# Altium PCB M10S Breakout Schematic.PcbDoc
Units mm, origin at the board's own origin, x right, y up, seen from the top; angles counter-clockwise.
Board outline 60.02 x 29.99 mm, 4 copper layers (Top Layer, Mid Layer 1, Mid Layer 2, Bottom Layer), stack 1.57 mm thick; 33 components, 23 nets, 98 pads, 47 vias.
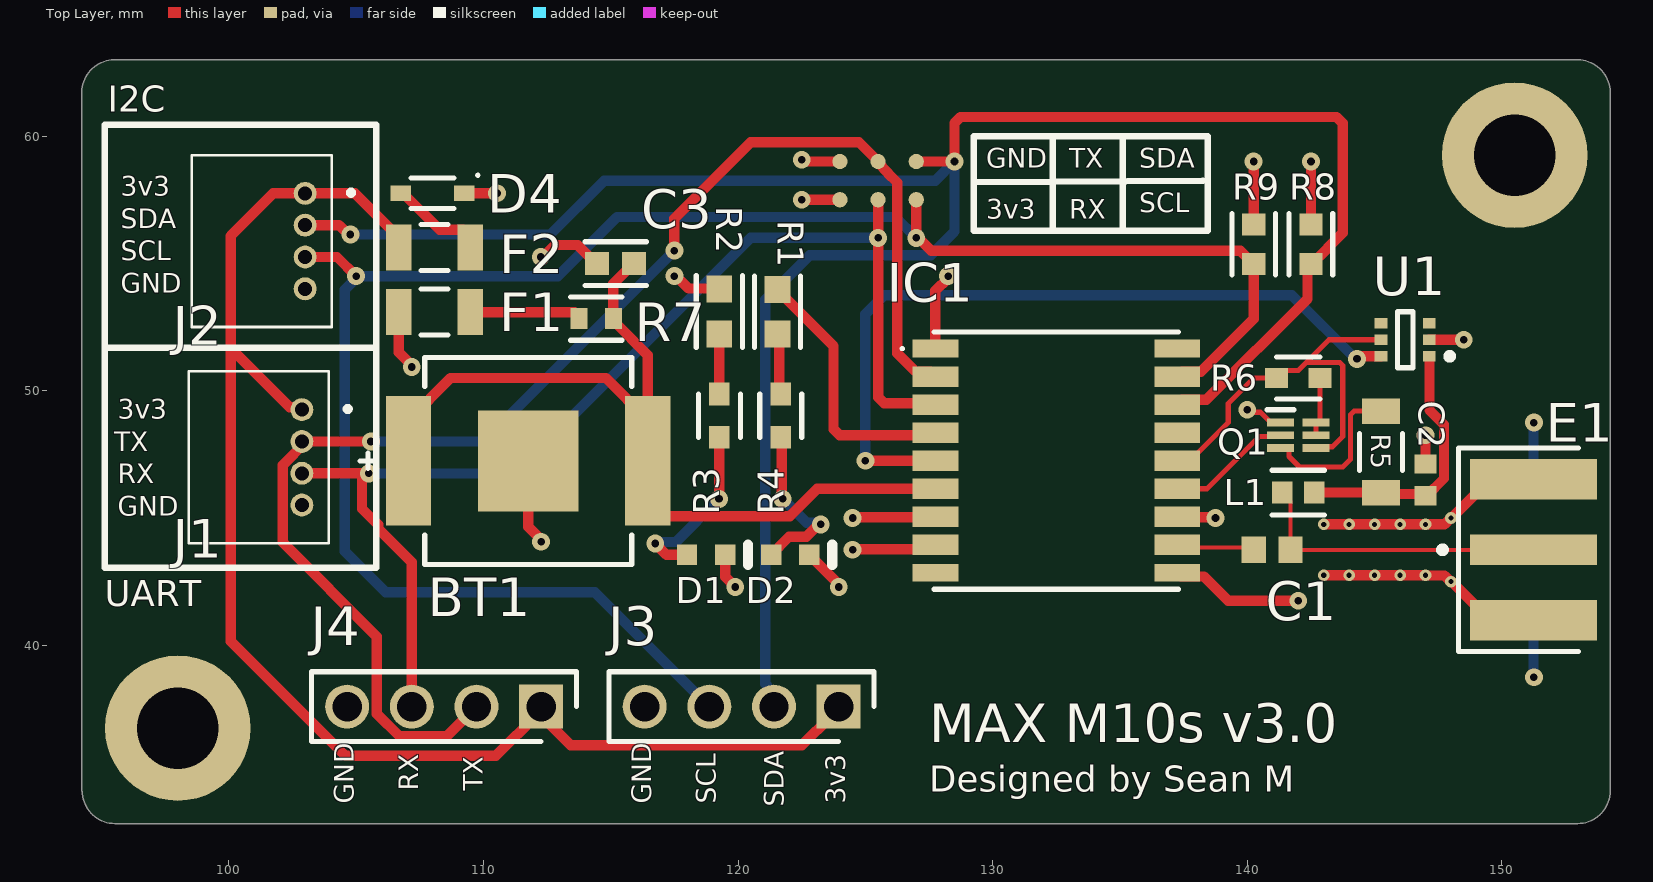
[diagram p0: Top Layer view]
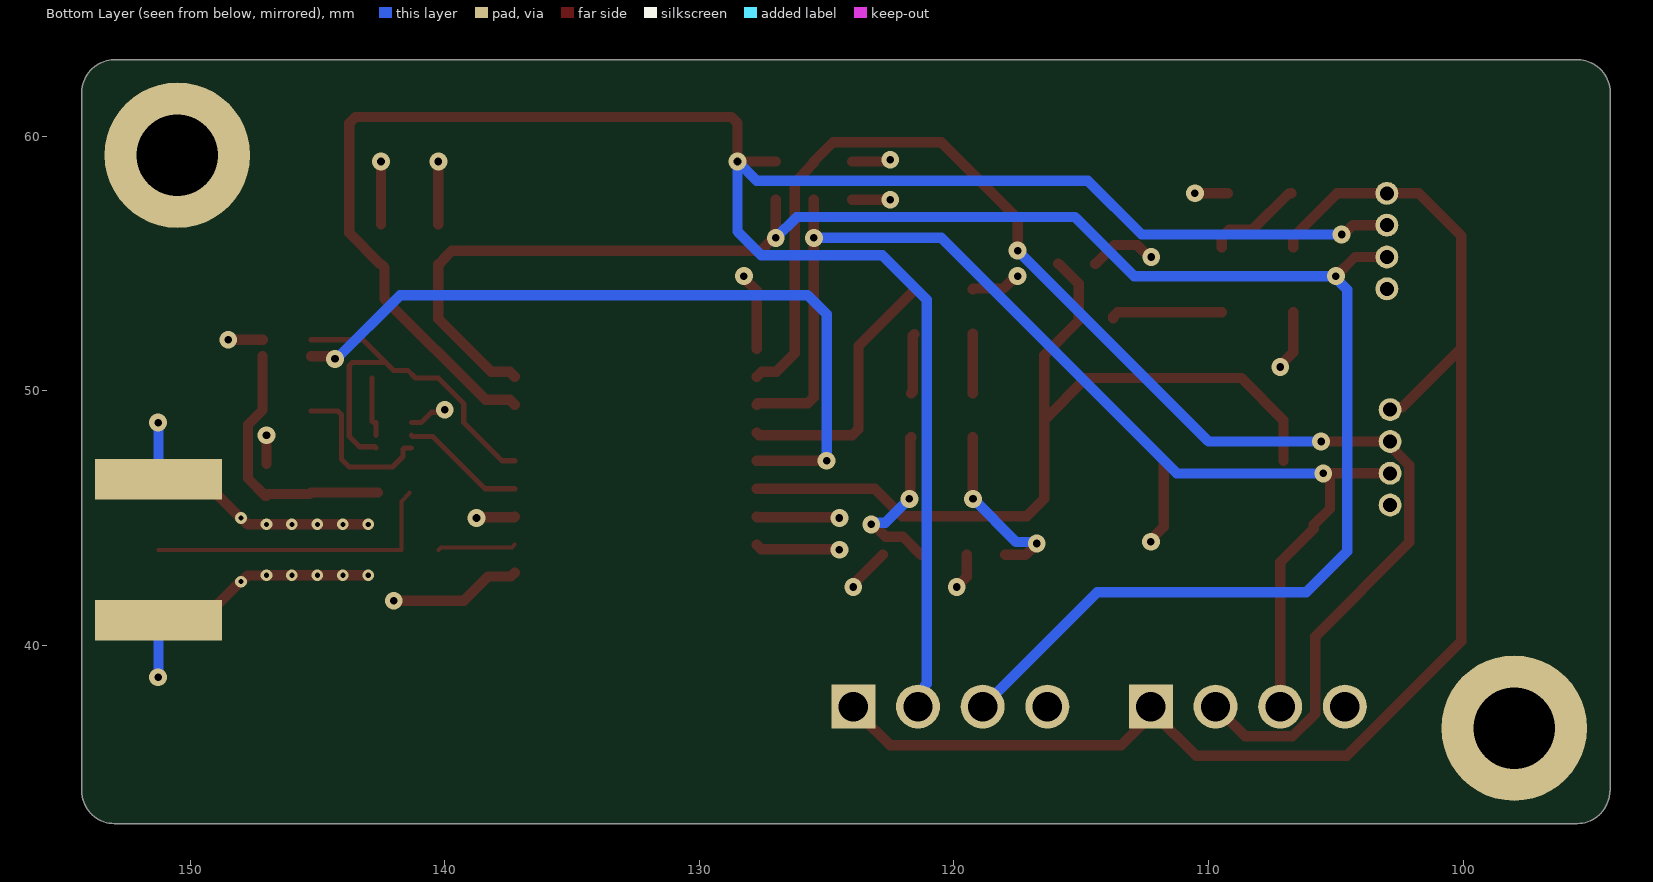
[diagram p1: Bottom Layer view, seen from below]
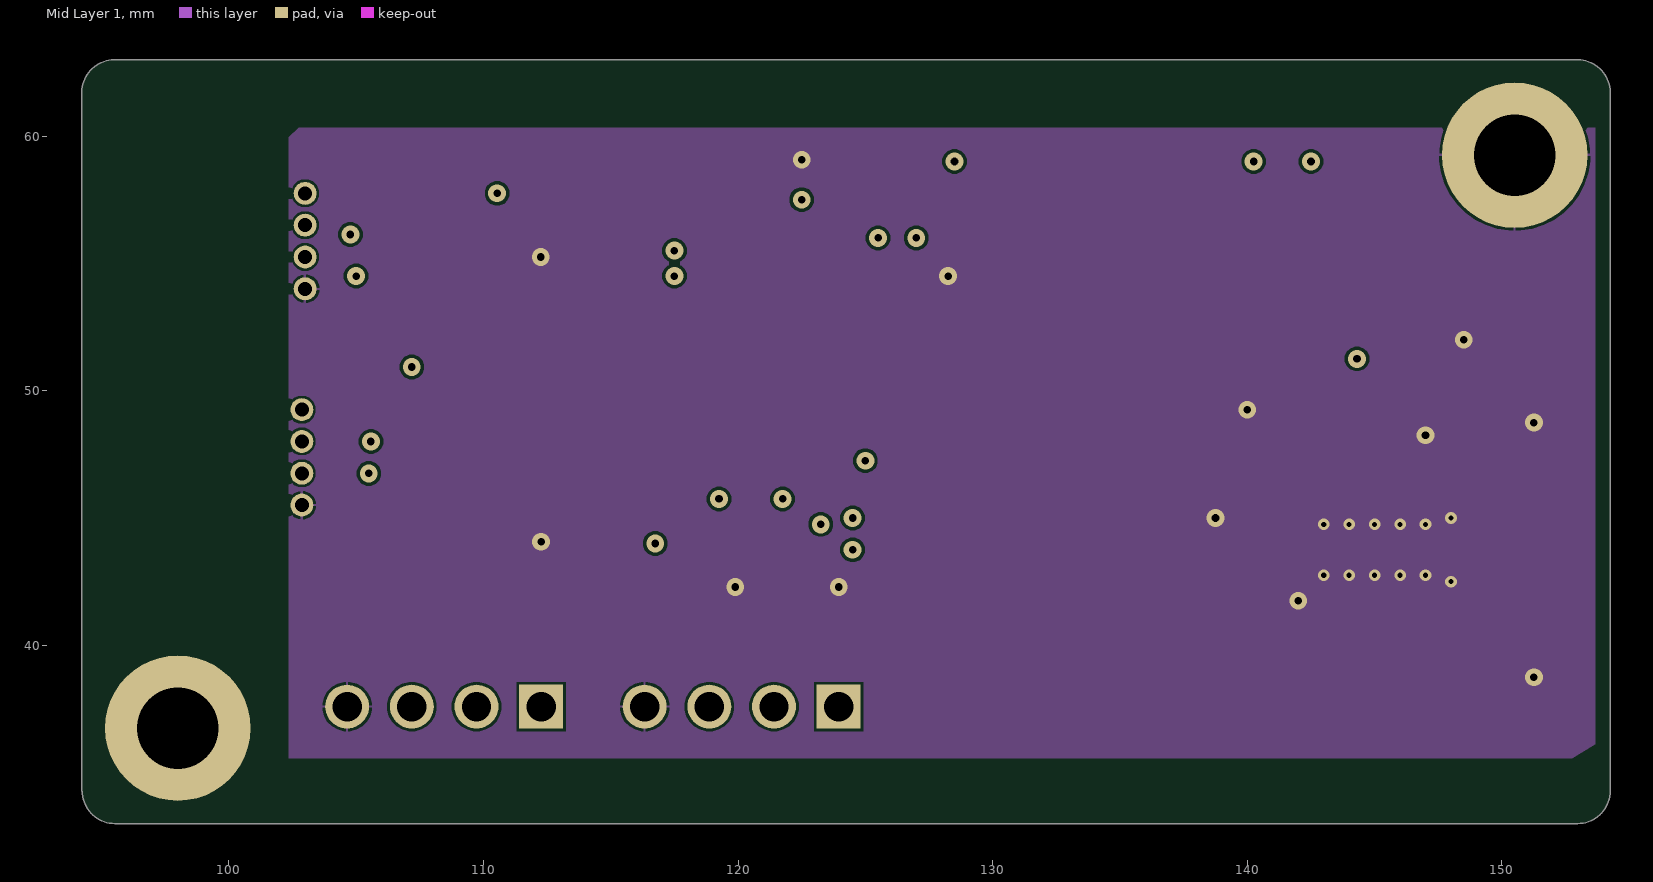
[diagram p2: Mid Layer 1]
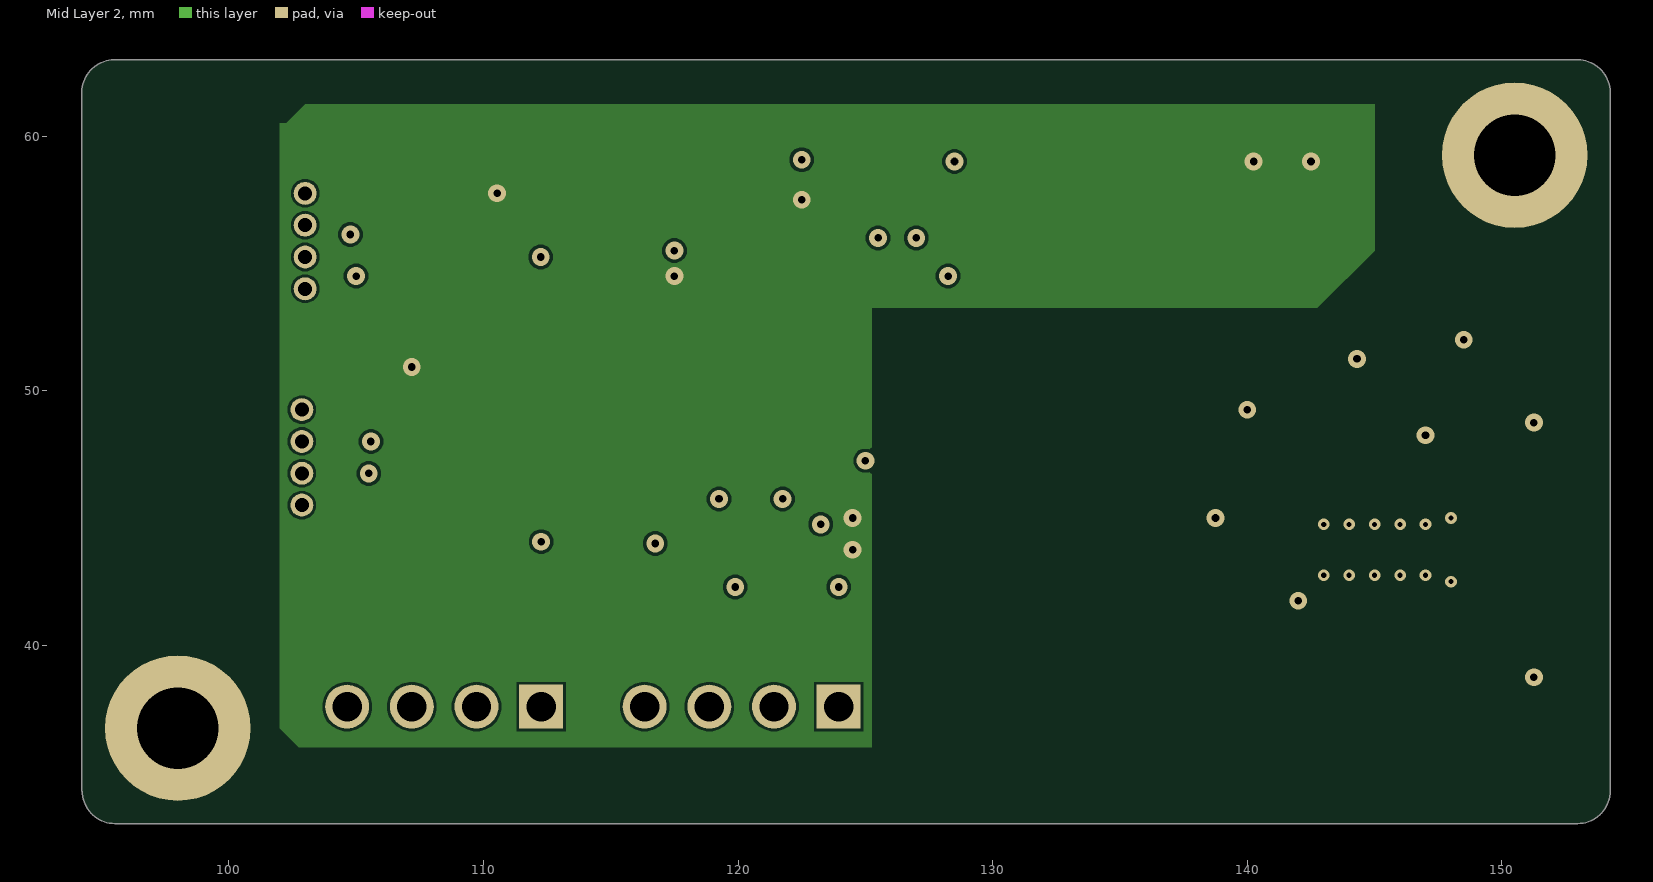
[diagram p3: Mid Layer 2]
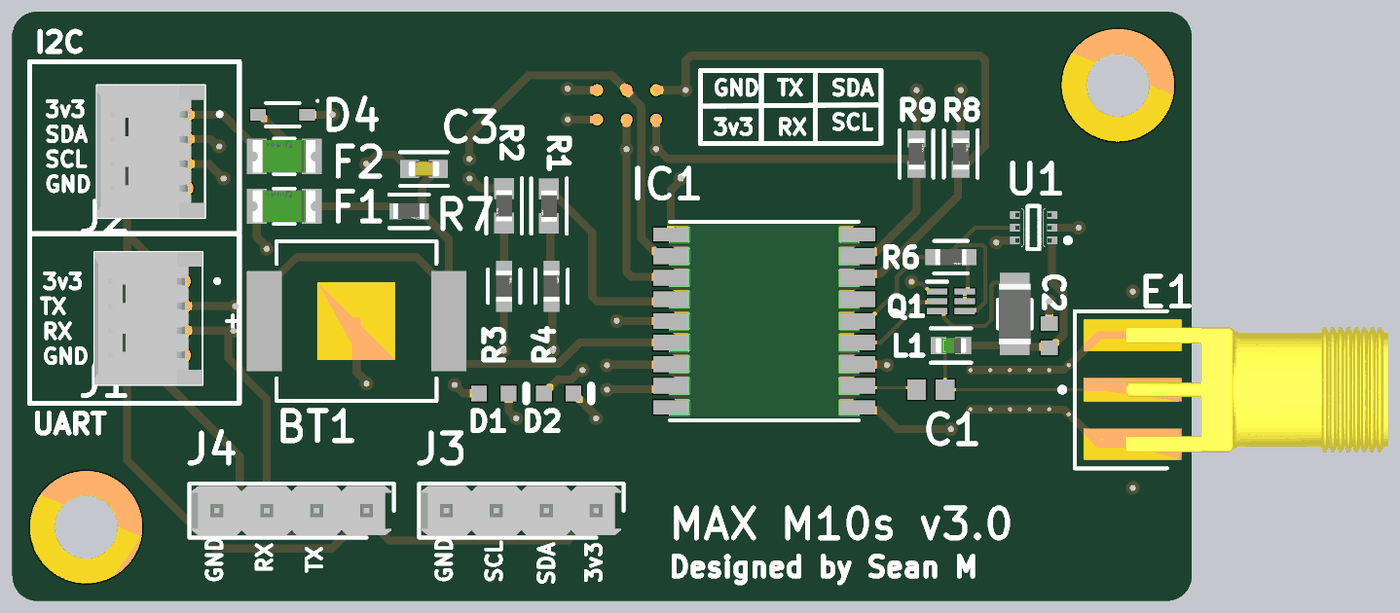
[diagram p4: 3D render of the assembled board from above, using the file's embedded part models]

## Layer stack, top to bottom
Top Solder: solder mask 0.0127, Solder Resist, Dk 3.8
Top Layer: signal copper 0.035
Dielectric 1: prepreg 0.1, 2313, Dk 4.05
Mid Layer 1: signal copper 0.0175
Core: core 1.265, FR-4, Dk 4.5
Mid Layer 2: signal copper 0.0175
Dielectric 2: prepreg 0.1, 2313, Dk 4.05
Bottom Layer: signal copper 0.035
Bottom Solder: solder mask 0.0127, Solder Resist, Dk 3.8

## Board outline
94.23,34.29 ccw(c94.25,34.29) 94.25,34.27 ccw(c95.52,34.27) 95.52,33 152.98,33 ccw(c152.98,34.27) 154.25,34.27 154.25,61.722 ccw(c152.98,61.722) 152.98,62.992 95.5,62.992 ccw(c95.5,61.722) 94.23,61.722

## Design rules (kind name [scope] priority, off if disabled: settings)
BoardOutlineClearance [All] p1: gap=0.2 ignorepadtopadclearanceinfootprint=FALSE
Clearance [All] p1: gap=0.102 ignorepadtopadclearanceinfootprint=FALSE except(0.127: Arc-Via Track-Via SMDPad-Via THPad-Via Via-Via Via-Fill Via-Poly Via-Region Via-Text; 0.25: Arc-Hole Track-Hole SMDPad-Hole THPad-Hole Via-Hole Fill-Hole Poly-Hole Region-Hole Text-Hole)
ComponentClearance [All] p1: gap=0.102 collisioncheckmode=3 verticalgap=0.102 showdistances=TRUE
DiffPairsRouting [All] p1: maxlimit=0.102 minlimit=0.102 mostfreqgap=0.102 toplayer_minwidth=0.102 toplayer_maxwidth=1816.048 toplayer_prefwidth=0.102 midlayer1_minwidth=0.102 midlayer1_maxwidth=1816.048 midlayer1_prefwidth=0.102 midlayer2_minwidth=0.102 midlayer2_maxwidth=1816.048 midlayer2_prefwidth=0.102 bottomlayer_minwidth=0.102 bottomlayer_maxwidth=1816.048 bottomlayer_prefwidth=0.102 maxuncoupledlength=12.7
Height [All] p1: minheight=0 maxheight=1816.048 prefheight=12.7
HoleSize [All] p1: absolutevalues=TRUE maxlimit=6.3 minlimit=0.2 maxpercent=80.000 minpercent=20.000
HoleToHoleClearance [All] p1: gap=0.25 allowstackedmicrovias=FALSE
MinimumAnnularRing [All] p1: minimumring=0.076
MinimumSolderMaskSliver [All] p1: minsoldermaskwidth=0
PlaneClearance [All] p1: clearance=0.102
PlaneConnect PlaneConnectPowerPads [InPadClass('PowerPads')] p1: planeconnectstyle=Direct reliefexpansion=0.508 reliefentries=4 reliefconductorwidth=0.254 reliefairgap=0.254
PlaneConnect [All] p2: pad.planeconnectstyle=Relief pad.reliefexpansion=0.3 pad.reliefentries=4 pad.reliefconductorwidth=0.102 pad.reliefairgap=0.102 via.planeconnectstyle=Direct via.reliefexpansion=0.3 via.reliefentries=4 via.reliefconductorwidth=0.127 via.reliefairgap=0.127
PolygonConnect PolygonConnectPowerPads [All vs (InPadClass('PowerPads'))] p1: connectstyle=Direct reliefconductorwidth=0.254 reliefentries=4 polygonreliefangle="90 Angle" airgapwidth=0.254
PolygonConnect [All] p2: thpad.connectstyle=Relief thpad.reliefconductorwidth=0.102 thpad.reliefentries=4 thpad.polygonreliefangle="90 Angle" thpad.airgapwidth=0.102 smdpad.connectstyle=Relief smdpad.reliefconductorwidth=0.102 smdpad.reliefentries=4 smdpad.polygonreliefangle="90 Angle" smdpad.airgapwidth=0.102 via.connectstyle=Direct via.reliefconductorwidth=0.127 via.reliefentries=4 via.polygonreliefangle="90 Angle" via.airgapwidth=0.127
RoutingVias [All] p1: holewidth=0.2 width=0.45 viastyle="Through Hole" minholewidth=0.2 minwidth=0.45 maxholewidth=6.3 maxwidth=6.55
SilkToSilkClearance [All] p1: silktosilkclearance=0
SilkToSolderMaskClearance [IsPad] p1: minsilkscreentomaskgap=0.102 clearancetoexposedcopper=TRUE
SolderMaskExpansion [All] p1: expansion=0.075 istentingtop=FALSE
Width [All] p1: maxlimit=1816.048 minlimit=0.102 preferedwidth=0.102
20 further rules are at their usual default settings.

## Classes and differential pairs
component class "M10S Breakout Schematic": 3v3 BT1 C1 C2 C3 D1 D2 D4 E1 F1 F2 IC1 J1 J2 J3 J4 L1 Q1 R1 R2 R3 R4 R5 R6 R7 R8 R9 U1

## Components (designator, comment, footprint, x,y, rotation, side; value= is the part's Value field where it differs from the comment)
BT1 "2998" FP-2998-MFG 111.76,47.244 r0 top
C1 "47pF" CAPC1608X90X35ML10T15 140.975,43.75 r180 top
C2 "10nF" CAPC1608X90X35LL10T15 147,46.5 r90 top
C3 "1uF" FP-GCM188-0_1-IPC_B 115.189,54.991 r180 top
D1 "Red LED" AVAG-HSMX-C190_V 118.745,43.561 r0 top
D2 "Green LED" AVAG-HSMX-C190_V 122.047,43.561 r0 top
D4 "BAT60A" INF-SOD323_V 108,57.75 r270 top
E1 "CON-SMA-EDGE-S" FP-CON-SMA-EDGE-S-MFG 158.5,43.75 r270 top
F1 "1206L050YR" FP-1206L050YR-MFG 108.08,53.086 r180 top
F2 "1206L050YR" FP-1206L050YR-MFG 108.08,55.626 r180 top
IC1 "MAX-M10S-00B" MAXM10S00B 132.5,47.25 r180 top
J1 "53048-0410" 530480410 102.87,49.256 r90 top
J2 "53048-0410" 530480410 103,57.75 r90 top
J3 "22-28-4042" HDRV4W66P0X254_1X4_1016X249X1003P 123.952,37.592 r180 top
J4 "22-28-4042" HDRV4W66P0X254_1X4_1016X249X1003P 112.268,37.592 r180 top
L1 "27pF" FP-LQG18HH_00-IPC_C 142,46 r180 top
Q1 "SI1016X-T1-GE3" SOT50P160X60-6N 142,48.25 r0 top
R1 "0R" FP-AC0603-IPC_A 121.551,53.098 r270 top
R2 "0R" FP-AC0603-IPC_A 119.265,53.111 r270 top
R3 "1k" FP-AC0603-MFG 119.265,49.022 r90 top
R4 "1k" FP-AC0603-MFG 121.678,49.022 r90 top
R5 "10R" FP-AC1206-MFG 145.25,47.6 r90 top value=10Ω
R6 "100kR" FP-AC0603-MFG 142,50.5 r0 top
R7 "3k3" FP-AC0603-IPC_C 114.427,52.832 r0 top
R8 "2.2k" FP-AC0603-IPC_B 142.5,55.75 r90 top
R9 "2.2k" FP-AC0603-IPC_B 140.25,55.75 r90 top
TP2 "TPAD6R" TP06R 127,57.5 r0 top
TP3 "TPAD6R" TP06R 124,57.5 r0 top
TP4 "TPAD6R" TP06R 127,59 r0 top
TP5 "TPAD6R" TP06R 125.5,57.5 r0 top
TP6 "TPAD6R" TP06R 124,59 r0 top
TP7 "TPAD6R" TP06R 125.5,59 r0 top
U1 "NC7WZ07P6X" FP-419AD-01-MFG 146.2,52 r180 top

## Footprints (in the part's own frame and the unit in brackets; to place one, negate y for a bottom-side part, rotate by r counter-clockwise, add the part's x,y. Pads: shape width x height; smd on the part's side, far side on the other; paste and mask are expansions set on the pad)
530480410 [mm]
  round 0.9 hole 0.55: 1(0,0) 2(-1.25,0) 3(-2.5,0) 4(-3.75,0)
  silkscreen extent -5.25,-1.9 1.5,4.45, body extent -5.24,-1.04 1.51,4.45, height 3.39
AVAG-HSMX-C190_V [mm] "SMD, 2-Leads, Body 1.6x0.8mm, Height 0.9mm"
  rect 0.8x0.8 smd: 1(-0.75,0) 2(0.75,0)
  silkscreen extent 1.65,-0.4 1.65,0.4, body extent -0.8,-0.4 0.8,0.4, height 0.9
CAPC1608X90X35LL10T15 [mm] "Chip Capacitor, 2-Leads, Body 1.60x0.80mm, IPC High Density"
  rect 0.75x0.85 smd: 1(-0.625,0) 2(0.625,0)
  body extent -0.85,-0.45 0.85,0.45, height 0.9
CAPC1608X90X35ML10T15 [mm] "Chip Capacitor, 2-Leads, Body 1.60x0.80mm, IPC Low Density"
  rect 0.95x1.05 smd: 1(-0.725,0) 2(0.725,0)
  body extent -0.85,-0.45 0.85,0.45, height 0.9
FP-419AD-01-MFG [mm]
  rect 0.5x0.4 smd paste+0 mask+0: 1(-0.95,0.65) 2(-0.95,0) 2(0.95,-0.65) 3(-0.95,-0.65) 5(0.95,0) 6(0.95,0.65)
  silkscreen extent -1.88,-1.1 0.3,1.1, body extent -1.3,-1.2 1.3,1.2, height 0.25
FP-1206L050YR-MFG [mm]
  rect 1x1.8 smd paste+0 mask+0: 1(-1.4,0) 2(1.4,0)
  silkscreen extent -0.53,-0.9 0.53,0.9, body extent -2,-1 2,1, height 0.25
FP-2998-MFG [mil]
  rect 156x156 smd paste-39370.1 mask+0: 1(0,0)
  rect 70x200 smd paste+0 mask+0: 2(-185,0) 2(185,0)
  silkscreen extent -260,-160 160,160
FP-AC0603-IPC_A [mm]
  rect 1.059x1.012 smd paste+0 mask+0: 1(-0.877,0) 2(0.877,0)
  silkscreen extent -1.41,-0.91 1.41,0.91, body extent -1.91,-1.01 1.91,1.01, height 0.25
FP-AC0603-IPC_B [mm]
  rect 0.859x0.912 smd paste+0 mask+0: 1(-0.777,0) 2(0.777,0)
  silkscreen extent -1.21,-0.86 1.21,0.86, body extent -1.46,-0.71 1.46,0.71, height 0.25
FP-AC0603-IPC_C [mm]
  rect 0.659x0.812 smd paste+0 mask+0: 1(-0.677,0) 2(0.677,0)
  silkscreen extent -1.01,-0.85 1.01,0.85, body extent -1.11,-0.55 1.11,0.55, height 0.25
FP-AC0603-MFG [mm]
  rect 0.9x0.8 smd paste+0 mask+0: 1(-0.85,0) 2(0.85,0)
  silkscreen extent -0.85,-0.82 0.85,0.82, body extent -1.4,-0.55 1.4,0.55, height 0.25
FP-AC1206-MFG [mm]
  rect 1x1.5 smd paste+0 mask+0: 1(-1.6,0) 2(1.6,0)
  silkscreen extent -0.72,-0.85 0.72,0.85, body extent -2.2,-0.95 2.2,0.95, height 0.25
FP-CON-SMA-EDGE-S-MFG [mm]
  rect 1.2x5 smd paste-2539.97 mask+0: 1(0,-7.26)
  rect 1.6x5 smd paste-2539.97 mask+0: 2(-2.77,-7.26) 3(2.77,-7.26)
  rect 1.6x5 smd far side paste-2539.97 mask+0: 4(-2.77,-7.26) 5(2.77,-7.26)
  silkscreen extent -4,-10.96 4,-5.5, body extent -3.67,-9.86 3.67,4.86, height 0.25
FP-GCM188-0_1-IPC_B [mm]
  rect 0.959x0.912 smd paste+0 mask+0: 1(-0.727,0) 2(0.727,0)
  silkscreen extent -1.21,-0.86 1.21,0.86, body extent -1.46,-0.71 1.46,0.71, height 0.25
FP-LQG18HH_00-IPC_C [mm]
  rect 0.806x0.858 smd paste+0 mask+0: 1(-0.626,0) 2(0.626,0)
  silkscreen extent -1.03,-0.87 1.03,0.87, body extent -1.13,-0.58 1.13,0.58, height 0.25
HDRV4W66P0X254_1X4_1016X249X1003P [mm]
  rect 1.725x1.725 hole 1.15: 1(0,0)
  round 1.725 hole 1.15: 2(2.54,0) 3(5.08,0) 4(7.62,0)
  silkscreen extent -1.4,-1.37 9.02,1.37, body extent -1.27,-1.24 8.89,1.24, height 9.78
INF-SOD323_V [mm] "SOD, 2-Leads, Body 1.7x1.25 mm"
  rect 0.6x0.8 smd: 1(0,1.25) 2(0,-1.25)
  silkscreen extent -0.76,-0.85 0.6,1.83, body extent -0.63,-0.85 0.63,0.85, height 1.1
MAXM10S00B [mm]
  rect 1.8x0.7 smd: 1(4.75,-4.4) 9(4.75,4.4) 10(-4.75,4.4) 18(-4.75,-4.4)
  rect 1.8x0.8 smd: 2(4.75,-3.3) 3(4.75,-2.2) 4(4.75,-1.1) 5(4.75,0) 6(4.75,1.1) 7(4.75,2.2) 8(4.75,3.3) 11(-4.75,3.3) 12(-4.75,2.2) 13(-4.75,1.1) 14(-4.75,0) 15(-4.75,-1.1) 16(-4.75,-2.2) 17(-4.75,-3.3)
  silkscreen extent -4.8,-5.05 6.1,5.05, body extent -4.85,-5.19 4.85,4.91
SOT50P160X60-6N [mm]
  rect 1.05x0.3 smd: 1(-0.7,0.5) 2(-0.7,0) 3(-0.7,-0.5) 4(0.7,-0.5) 5(0.7,0) 6(0.7,0.5)
  silkscreen extent -1.22,1 -0.18,1
TP06R [mm] "Testpoint, round, d=0.6mm"
  round 0.6 smd paste-1: 1(0,0)

## Part data
BT1: library part CMP-19636-000010-1, "BATTERY RETAINER COIN 6.8MM SMD", Case/Package=SMD/SMT, Color=Silver, Package Quantity=100, Contact Material=Bronze, Height=2.9mm, Lead Free="Lead Free", Material=Bronze, Mount="Surface Mount", Number of Batteries=1, Number of Cells=1, REACH SVHC="No SVHC", Termination=SMD/SMT
C1: library part CMP-2006-02325-1, Manufacturer=Murata, Part Number=GCM1885C1H470JA16D
C2: library part CMP-2006-02373-1, Manufacturer=Murata, Part Number=GCM188R71H103KA37D
C3: library part CMP-2006-02358-2, "Ceramic Capacitor for Automotive 1uF  ±10% 16VDC X7R 0603 Paper T/R", Case Code (Imperial)=0603, Case Code (Metric)=1608, Dielectric=X7R, Max Operating Temperature=125°C, Min Operating Temperature=-55°C, Ratings=AEC-Q200, Tolerance=10%, Voltage Rating=16V, Capacitance=1uF, Case/Package=0603, Depth=0.8mm, Lead Free="Lead Free", Length=1.6mm, Mount="Surface Mount", Packaging="Tape and Reel", Radiation Hardening=No, Thickness=0.035inch, Voltage Rating (DC)=16V, Width=0.031inch
D1 D2: library part CMP-1744-00002-1, "Chip LED, Green, 2.2 V, -40 to 85 degC, 2-Pin SMD, RoHS, Tape and Reel", Case\Package=SOIC, Clock Frequency="100 KHz", Frequency="400 KHz", Max Operating Temperature="85 degC", Max Supply Voltage="5.5 V", Min Operating Temperature="-40 degC", Min Supply Voltage="1.7 V", Nominal Supply Current="2 mA", Package Quantity=3000, Access Time="3500 ns", ComponentLink1Description="Manufacturer URL", ComponentLink1URL=http://www.avagotech.com/, ComponentLink2Description=Datasheet, ComponentLink2URL=http://docs.avagotech.com/docs/AV02-0551EN, ComponentLink3Description="Package Specification", ComponentLink3URL=http://www.fairchildsemi.com/dwg/MA/MA03D.pdf, DatasheetVersion=Mar-12, Density="32 kb", Height="1.5 mm", Interface=Serial, Length="5 mm", Max Clock Frequency="100 KHz", Mount="Surface Mount", PackageDescription="2-Pin Surface Mount Device, Body 1.6 x 0.8 mm, Height 0.9 mm", PackageReference=HSMX-C190, Packaging="Tape and Reel", Pins=8, Radiation Hardening=No, REACH SVHC="No SVHC", RoHSCompliant=true, Width="4 mm"
D4: library part CMP-1183-00008-2, "Silicon Schottky Diode, -55 to 85 degC, SOD323, Reel, Green", Manufacturer=Infineon, ComponentLink1Description="Manufacturer URL", ComponentLink1URL=http://www.infineon.com/, ComponentLink2Description=Datasheet, ComponentLink2URL=http://www.infineon.com/dgdl/bat60aseries.pdf?folderId=db3a304313d846880113def5812204a1&fileId=db3a304313d846880113def70c9304a9, ComponentLink3Description="Package Specification", ComponentLink3URL=http://www.infineon.com/dgdl/SOT323-Package_Overview.pdf?folderId=db3a30431936bc4b0119533e1dcb3c92&fileId=db3a30431936bc4b011953495f283cb1, Configuration=Single, CT (max)="35Â pF", Green=TRUE, IF (max)="3,000Â mA", Mounting Technology="Surface Mount", PackageDescription="3-Pin Small Outline Transistor Package, 1.25 x 2 mm Body, 0.65 mm Pitch", PackageReference=SOT323, Packing=Reel, PartNumber=BAT60A, VF (max)="370Â mV", VR (max)="10Â V"
E1: library part CMP-002-00071-2, "RF SMA Connector, 1 Contact(s), Female, Board Mount, Surface Mount Terminal, Locking"
F1 F2: library part CMP-08606-000073-1, "PTC RESET FUSE 6V 500MA 1206", Case Code (Imperial)=1206, Case Code (Metric)=3216, Current Rating=100A, Hold Current=500mA, Max Operating Temperature=85°C, Max Power Dissipation=600mW, Max Voltage Rating (DC)=6V, Min Operating Temperature=-40°C, Package Quantity=4000, Resistance=700mR, Trip Current=1A, Approvals=cULus, Case/Package=1206, Height=0.75mm, Lead Free="Lead Free", Length=3.4mm, Max Current Rating=100A, Operating Supply Voltage=6V, Packaging="Tape and Reel", Power Dissipation=600mW, REACH SVHC="No SVHC", RoHS Compliant=Yes, Series=1206L, Terminal Material=Copper, Termination=SMD/SMT, Time to Trip=0.1s, Voltage Rating=6V, Voltage Rating (DC)=6V, Width=1.8mm, Working Voltage=6V
IC1: "Integrated Circuit", Manufacturer_Name=U-Blox, Mouser Part Number=377-MAX-M10S-00B, Datasheet Link=https://content.u-blox.com/sites/default/files/MAX-M10S_IntegrationManual_UBX-20053088.pdf, Height=2.7mm, Manufacturer_Part_Number=MAX-M10S-00B, Mouser Price/Stock=https://www.mouser.co.uk/ProductDetail/u-blox/MAX-M10S-00B?qs=A6eO%252BMLsxmT0PfQYPb7LLQ%3D%3D
J1 J2: "Connector", Manufacturer_Name=Molex, Mouser Part Number=538-53048-0410, Datasheet Link=https://www.molex.com/pdm_docs/sd/530480410_sd.pdf, Height=3.7mm, Manufacturer_Part_Number=53048-0410, Mouser Price/Stock=https://www.mouser.co.uk/ProductDetail/Molex/53048-0410?qs=359VwiUTsp2msj5Tobchuw%3D%3D
J3 J4: "Connector", Manufacturer_Name=Molex, Mouser Part Number=538-22-28-4042, Datasheet Link=https://www.molex.com/content/dam/molex/molex-dot-com/products/automated/en-us/salesdrawingpdf/423/42375/022284042_sd.pdf?inline, Height=10.03mm, Manufacturer_Part_Number=22-28-4042, Mouser Price/Stock=https://www.mouser.co.uk/ProductDetail/Molex/22-28-4042?qs=GAPJcf4kvdu6DqYOOlzdaQ%3D%3D
L1: library part CMP-06042-012021-1, "Multilayer type Inductor for Automotive 27nH ±5% 0.54Ω 500mA 0603", Case/Package=0603, DC Resistance (DCR)=4.18mR, Inductance=27nH, Package Quantity=4000, Packaging="Tape and Reel", Termination=SMD/SMT
Q1: "Transistor", Manufacturer_Name=Vishay, Mouser Part Number=781-SI1016X-T1-GE3, Arrow Part Number=SI1016X-T1-GE3, Arrow Price/Stock=https://www.arrow.com/en/products/si1016x-t1-ge3/vishay?region=nac, Datasheet Link=https://componentsearchengine.com/Datasheets/1/SI1016X-T1-GE3.pdf, Height=0.6mm, Manufacturer_Part_Number=SI1016X-T1-GE3, Mouser Price/Stock=https://www.mouser.co.uk/ProductDetail/Vishay-Semiconductors/SI1016X-T1-GE3?qs=tWM4QuTcS4UASHtTakd5XQ%3D%3D
R1 R2: library part CMP-03412-047235-1, "RES 0Ω 0.00% 0.1W 0603", Case/Package=0603, Resistance=0mR, Tolerance=5%, Lead Free="Lead Free", RoHS Compliant=Yes
R3 R4: library part CMP-2000-04863-2, "RES 1kΩ 5.00% 0.1W 0603", Case Code (Imperial)=0603, Case Code (Metric)=1608, Max Operating Temperature=155°C, Max Power Dissipation=100mW, Min Operating Temperature=-55°C, Ratings=AEC-Q200, Resistance=1kR, Resistor Type="Thick Film", Temperature Coefficient=100ppm/°C, Tolerance=5%, Voltage Rating=50V, Case/Package=0603, Construction=Rectangular, Contact Plating=Tin, Depth=0.8mm, Features="Moisture Resistant", Height=0.45mm, Lead Free="Lead Free", Length=1.6mm, Military Standard=Not, Number of Terminations=2, Packaging="Tape and Reel", Power Rating=100mW, Radiation Hardening=No, RoHS Compliant=Yes, Series=AC, Size Code=0603, Termination=SMD/SMT, Width=0.8mm
R5: library part CMP-03412-007974-1, "RES SMD 10 OHM 5% 1/4W 1206", Manufacturer=Yageo, Manufacturer Part Number=AC1206JR-0710RL, Package=AC1206, Power Rating=0.25W, Resistance=10Ω, Temperature="-55°C to +155°C", Temperature Range High=+155°C, Temperature Range Low=-55°C, Tolerance=0.05, Voltage Rating=200V, Automotive=Yes, Automotive Grade="Grade 0", Category=Res, ComponentLink2Description=Datasheet, ComponentLink2URL=http://www.yageo.com/NewPortal/yageodocoutput?fileName=/pdf/R-Chip/PYu-AC_51_RoHS_L_6.pdf, Composition="Thick Film", Device Class L1="Passive Components", Device Class L2=Resistors, Device Class L3="Chip SMD Resistors", Digikey Description="RES SMD 10 OHM 5% 1/4W 1206", Footprint Url=http://www.yageo.com/exep/pages/download/literatures/PYu-R_Mount_10.pdf, Height=0.65mm, Ipc Land Pattern Name=RESC310160X55, Lead Free=Yes, Mouser Description="Res Thick Film 1206 10 Ohm 5% 0.25W(1/4W) ±200ppm/C Epoxy Pad SMD Automotive T/R", Octopart=https://octopart.com/ac1206jr-0710rl-yageo-30511263, RoHS=TRUE, Series=AC
R6: library part CMP-2000-04816-3, "RES 100KΩ 1.00% 0.1W 0603", Case Code (Imperial)=0603, Case Code (Metric)=1608, Max Operating Temperature=155°C, Max Power Dissipation=100mW, Min Operating Temperature=-55°C, Package Quantity=1, Ratings=AEC-Q200, Resistor Type="Thick Film", Temperature Coefficient=100ppm/°C, Tolerance=1%, Voltage Rating=50V, Working Voltage=75V, Case/Package=0603, Construction=Rectangular, Depth=0.8mm, Features="Moisture Resistant", Height=0.022inch, Lead Free="Lead Free", Length=1.6mm, Military Standard=Not, Moisture Sensitivity Level=1, Number of Terminations=2, Packaging="Tape and Reel", Power Rating=100mW, Resistance=100kR, RoHS Compliant=Yes, Series=AC, Technology="THICK FILM", Termination=SMD/SMT, Width=0.031inch
R7: library part CMP-03412-024727-2, "RES 3.3KΩ 1.00% 0.1W 0603", Case Code (Imperial)=0603, Case Code (Metric)=1608, Max Operating Temperature=155°C, Max Power Dissipation=100mW, Min Operating Temperature=-55°C, Ratings=AEC-Q200, Resistance=3.3kR, Resistor Type="Thick Film", Temperature Coefficient=100ppm/°C, Tolerance=1%, Voltage Rating=50V, Case/Package=0603, Construction=Rectangular, Depth=0.8mm, Features="Moisture Resistant", Height=0.45mm, Lead Free="Lead Free", Length=1.6mm, Military Standard=Not, Number of Terminations=2, Packaging="Tape and Reel", Power Rating=100mW, RoHS Compliant=Yes, Series=AC, Size Code=0603, Termination=SMD/SMT, Width=0.8mm
R8 R9: library part CMP-2000-04835-3, "RES 2.2KΩ 1.00% 0.1W 0603", Case Code (Imperial)=0603, Case Code (Metric)=1608, Max Operating Temperature=155°C, Max Power Dissipation=100mW, Min Operating Temperature=-55°C, Package Quantity=1, Ratings=AEC-Q200, Resistance=2.2kR, Resistor Type="Thick Film", Temperature Coefficient=100ppm/°C, Tolerance=1%, Voltage Rating=50V, Case/Package=0603, Construction=Rectangular, Depth=0.8mm, Features="Moisture Resistant", Height=0.022inch, Lead Free="Lead Free", Length=0.063inch, Military Standard=Not, Number of Terminations=2, Packaging="Tape and Reel", Power Rating=100mW, RoHS Compliant=Yes, Series=AC, Size Code=0603, Termination=SMD/SMT, Width=0.031inch
TP2 TP3 TP4 TP5 TP6 TP7: library part CMP-00028-00002-2, "0.6mm round", Pins=1
U1: library part CMP-2000-06822-2, "IC BUF NON-INVERT 5.5V SC70-6", Case/Package=SC, High Level Output Current=32mA, Max Operating Temperature=85°C, Max Power Dissipation=180mW, Max Supply Current=24mA, Max Supply Voltage=5.5V, Min Operating Temperature=-40°C, Min Supply Voltage=1.65V, Package Quantity=1, Quiescent Current=1uA, Height=1mm, Lead Free="Lead Free", Length=2mm, Logic Function=Buffer, Low Level Output Current=32mA, Mount="Surface Mount", Number of Bits=2, Number of Bits per Element=1, Number of Channels=2, Number of Circuits=2, Number of Elements=2, Number of Input Lines=2, Number of Inputs=2, Number of Output Lines=2, Number of Outputs=2, Number of Pins=6, Packaging="Tape and Reel", Polarity=Non-Inverting, Propagation Delay=12.6ns, Radiation Hardening=No, REACH SVHC="No SVHC", Termination=SMD/SMT, Turn-On Delay Time=11.5ns, Weight=0.028g, Width=1.25mm

## Free pads (board coordinates)
  round 5.715 hole 3.2: 14(98,36.75) 15(150.5,59.25)

## Via types
v1: diameter 0.7, hole 0.3, Top Layer to Bottom Layer, tented top, 25 vias
v2: diameter 0.457, hole 0.203, Top Layer to Bottom Layer, tented top, 12 vias
v3: diameter 0.7, hole 0.3, Top Layer to Bottom Layer, tented both sides, 10 vias

## Nets (pads, with @x,y where several pads share a name; then routed paths per layer and width w, separated by ;. In a path a pad name is that pad's centre, name@x,y a point inside that pad or via, vN(x,y) a via of type N, cw(c..) or ccw(c..) an arc to the next point about the centre after c; other vN are vias at no path point)
3v3: D4.1 F1.2 IC1.7 IC1.8 R2.1 R8.2 R9.2 TP3.1 | length 18.7
  Top Layer w0.406: F1.2 106.68,51.514 107.188,51.006 v1(107.188,50.927) ; D4.1 v1(110.54,57.75) ; v1(117.5,54.5) 117.579,54.5 118.069,54.011 119.242,54.011 R2.1 ; v1(122.5,57.5) TP3.1 ; v1(124.5,43.75) 124.523,43.773 127.573,43.773 IC1.8 ; v1(124.5,45) 124.525,45.025 127.725,45.025 IC1.7 ; R9.2 v1(140.25,59) ; R8.2 v1(142.5,59)
BUF: C2.1 L1.1 R5.1 U1.1 | length 10.5
  Top Layer w0.4: L1.1 R5.1 145.313,45.937 146.937,45.937 C2.1 147.05,45.875 147.727,46.552 147.727,48.663 147.15,49.239 U1.1
EXTINT: IC1.5 U1.6 | length 30.1
  Top Layer w0.406: v3(125,47.25) IC1.5 ; v3(144.31,51.25) 144.389,51.25 144.486,51.347 145.247,51.347 U1.6
  Bottom Layer w0.406: v3(125,47.25) 125,53 125.75,53.75 141.75,53.75 144.25,51.25 v3(144.31,51.25)
GND: BT1.1 C2.2 C3.2 D1.2 D2.2 E1.2 E1.3 E1.4 E1.5 IC1.1 IC1.10 IC1.12 J1.4 J2.4 J3.4 J4.4 pad.15 Q1.1 TP6.1 U1.2@147.15,52 | length 47.3
  Top Layer w0.2: v1(140,49.25) 140.096,49.154 140.521,49.154 140.925,48.75 Q1.1
  Top Layer w0.406: J4.4@104.546,37.338 J4.4@104.546,37.614 ; BT1.1 111.76,44.653 112.268,44.145 v1(112.268,44.069) ; v1(112.25,55.25) 112.329,55.25 112.799,55.72 113.71,55.72 114.439,54.991 C3.2 ; D1.2 119.495,42.684 v1(119.888,42.291) ; v1(122.5,59.07) 122.556,59.014 122.746,59.014 122.76,59 TP6.1 ; D2.2 123.896,42.462 123.896,42.347 v1(123.952,42.291) ; IC1.1 127.75,53.921 128.25,54.421 v1(128.25,54.5) ; IC1.10 137.397,42.703 138.297,42.703 139.25,41.75 v1(142,41.75) ; IC1.12 137.275,45.025 138.725,45.025 v1(138.75,45) ; v2(143,42.75) v2(144,42.75) v2(145,42.75) v2(146,42.75) v2(147,42.75) 147.01,42.74 147.746,42.74 147.986,42.5 v2(148,42.5) 148.01,42.49 148.03,42.49 149.54,40.98 E1.3 ; v2(143,44.75) v2(144,44.75) v2(145,44.75) v2(146,44.75) v2(147,44.75) 147.01,44.76 147.746,44.76 147.986,45 v2(148,45) 148.01,45.01 148.03,45.01 149.54,46.52 E1.2 ; C2.2 v1(147,48.25) ; U1.2@147.15,52 v1(148.5,52)
  Bottom Layer w0.406: E1.5 151.24,38.76 v1@151.25,38.75 ; E1.4 151.24,48.74 v1@151.25,48.75
  other v1: 151.255,38.747 151.255,48.747
LNA_EN: IC1.13 Q1.2 | length 4.9
  Top Layer w0.203: IC1.13 138.419,46.15 140.47,48.202 141.252,48.202 Q1.2
NetD1_1: D1.1 R3.1 | length 7.1
  Top Layer w0.406: v3(116.75,44) 117.189,43.561 D1.1 ; v3(119.25,45.75) 119.258,45.758 119.258,48.164 R3.1
  Bottom Layer w0.406: v3(116.75,44) 116.806,44.056 117.556,44.056 v3(119.25,45.75)
NetD2_1: D2.1 R4.1 | length 6.8
  Top Layer w0.406: D2.1 122.002,44.266 122.686,44.266 123.171,44.75 v3(123.25,44.75) ; R4.1 121.714,48.136 121.714,45.786 v3(121.75,45.75)
  Bottom Layer w0.406: v3(121.75,45.75) 122.694,44.806 123.194,44.806 v3(123.25,44.75)
NetD4_2: D4.2 F2.1 | length 3.9
  Top Layer w0.406: D4.2 106.743,57.743 106.857,57.743 108.277,56.323 109.183,56.323 109.48,56.026 F2.1 F2.1@109.487,55.633
NetF1_1: F1.1 R7.1 | length 4.4
  Top Layer w0.406: F1.1 113.573,53.086 113.75,52.909 R7.1
NetQ1_3: Q1.3 R5.2 | length 6.4
  Top Layer w0.203: Q1.3 141.587,47.75 141.636,47.702 141.636,47.414 142.05,47 143.75,47 144.055,47.305 144.055,49.055 144.2,49.2 R5.2
NetQ1_5: Q1.5 Q1.6 R6.2 | length 2.4
  Top Layer w0.203: Q1.5 Q1.6 142.802,48.75 142.85,48.798 R6.2
NetR1_2: R1.2 R4.2 | length 2.4
  Top Layer w0.406: R1.2 121.615,52.158 121.615,49.962 R4.2@121.678,49.899
NetR2_2: R2.2 R3.2 | length 2.3
  Top Layer w0.406: R3.2@119.265,49.899 R2.2
PPS: IC1.4 R1.1 | length 10.5
  Top Layer w0.406: R1.1 121.551,53.952 123.75,51.753 123.75,48.488 123.988,48.25 127.65,48.25 IC1.4
RF_IN: C1.2 IC1.11 | length 3.1
  Top Layer w0.157: IC1.11 137.35,43.85 140.15,43.85 C1.2
RX: IC1.3 J1.3 J4.3 TP5.1 | length 46.2
  Top Layer w0.406: J1.3 102.873,46.759 105.491,46.759 v3(105.5,46.75) ; 105.232,46.482 105.232,45.365 105.867,44.73 105.867,44.578 107.188,43.257 J4.3 ; v1@125.5,55.864 125.5,49.738 125.738,49.5 127.7,49.5 IC1.3 ; v1(125.5,56) TP5.1
  Bottom Layer w0.406: v3(105.5,46.75) 111.25,46.75 120.5,56 v1(125.5,56)
SCL: IC1.17 J2.3 J3.3 R9.1 TP2.1 | length 74.7
  Top Layer w0.406: J2.3 104.25,55.25 v3(105,54.5) ; TP2.1 v1(127,56) 127.079,56 127.579,55.5 139.723,55.5 139.997,55.226 139.997,55.199 140.223,54.973 R9.1 140.25,52.831 138.166,50.747 137.447,50.747 IC1.17
  Bottom Layer w0.406: J3.3 114.378,42.086 106.164,42.086 104.552,43.698 104.552,53.973 105,54.421 v3(105,54.5) 112.924,54.5 115.244,56.82 126.18,56.82 v1(127,56)
SDA: IC1.16 J2.2 J3.2 R8.1 TP4.1 | length 87
  Top Layer w0.406: J2.2 104.33,56.5 104.696,56.134 v3(104.775,56.134) ; TP4.1 v1(128.5,59) 128.5,60.5 128.75,60.75 143.5,60.75 143.75,60.5 143.75,56.197 142.527,54.973 R8.1 142.365,54.839 142.365,53.615 138.397,49.647 137.447,49.647 IC1.16
  Bottom Layer w0.406: v3(104.775,56.134) 112.634,56.134 114.75,58.25 127.75,58.25 v1(128.5,59) 128.5,56.25 127.57,55.32 122.82,55.32 121.07,53.57 121.07,38.489 121.16,38.399 121.16,37.844 J3.2
SIG: C1.1 E1.1 L1.2 | length 11.9
  Top Layer w0.157: L1.2 141.374,45.974 141.7,45.648 C1.1 E1.1
TX: IC1.2 J1.2 J4.2 TP7.1 | length 55.5
  Top Layer w0.406: v3(105.582,48.006) 103.053,48.006 102.115,47.069 102.115,44.041 105.815,40.341 105.815,37.314 106.704,36.425 108.561,36.425 J4.2 ; v1(117.5,55.5) 117.5,56.75 120.5,59.75 124.75,59.75 TP7.1 125.5,58.948 125.887,58.56 125.887,58.539 126.25,58.176 126.25,51.469 126.972,50.747 127.553,50.747 IC1.2
  Bottom Layer w0.406: v3(105.582,48.006) 110.006,48.006 v1(117.5,55.5)
V_BCKP: BT1.2 C3.1 IC1.6 R7.2 | length 34.5
  Top Layer w0.406: BT1.2@107.061,47.244 107.061,48.844 108.717,50.5 114.803,50.5 BT1.2@116.459,48.844 ; C3.1 115.892,54.991 115.104,54.202 R7.2 115.104,52.755 116.459,51.4 BT1.2@116.459,48.844 ; IC1.6 123.112,46.15 122.032,45.07 117.145,45.07 116.459,45.756 116.459,47.244 BT1.2@116.459,48.844
VCC_RF: IC1.14 Q1.4 R6.1 U1.5 | length 15.9
  Top Layer w0.203: IC1.14 137.75,47.25 139.25,48.75 139.25,49.5 140.25,50.5 R6.1 141.448,50.798 142.011,50.798 142.316,51.103 ; Q1.4 142.748,47.798 143.346,47.798 143.75,48.202 143.75,50.984 143.631,51.103 142.316,51.103 ; U1.5 143.213,52 142.316,51.103
VIN: F2.2 J1.1 J2.1 J3.1 J4.1 | length 55.3
  Top Layer w0.406: J1.1 102.776,49.35 102.4,49.35 100.076,51.674 ; F2.2 106.68,56.026 104.956,57.75 J2.1 101.75,57.75 100.076,56.076 100.076,51.674 ; J3.1@123.673,37.236 122.505,36.069 113.435,36.069 112.166,37.338 110.491,35.663 104.571,35.663 100.076,40.158 100.076,51.674
pads on no net: IC1.9 IC1.15 IC1.18 U1.2@145.25,52.65 U1.3

## Polygon pours and split planes (outlines as drawn)
3v3 on Mid Layer 2 "NONET_L-01_P-001" (solid, pour order 6): 102.75,36 102,36.75 102,60.5 102.25,60.5 103,61.25 145,61.25 145,55.5 142.75,53.25 125.25,53.25 125.25,36
GND on Mid Layer 1 "GND_L02_P000" (solid, pour order 0): 153.67,60.325 153.67,36.106 152.764,35.56 102.362,35.56 102.362,59.944 102.743,60.325 102.362,59.944 102.743,60.325

## Silkscreen, mask and mechanical layers (free items; w line width, h text height)
Top Overlay:
  lines w0.254: 129.31,58.184 138.25,58.25 ; 132.354,56.406 132.354,59.962 ; 135.104,56.406 135.104,59.962 ; 95.123,51.689 105.791,51.689 ; 95.123,51.689 95.123,60.452 105.791,60.452 105.791,51.689 ; 95.123,51.689 105.791,51.689 ; 95.123,51.689 95.123,43.053 105.791,43.053 105.791,51.689 ; 129.25,56.288 138.44,56.288 138.44,60 129.25,60 129.25,56.288
  text "I2C" at 95.25,60.96 h1.02
  text "GND" at 129.754,58.754 h0.76
  text "TX" at 133.004,58.754 h0.76
  text "SDA" at 135.754,58.754 h0.76
  text "3v3" at 95.758,57.658 h0.76
  text "SCL" at 135.754,57.004 h0.76
  text "3v3" at 129.754,56.754 h0.76
  text "RX" at 133.004,56.754 h0.76
  text "SDA" at 95.758,56.388 h0.76
  text "SCL" at 95.758,55.118 h0.76
  text "GND" at 95.758,53.848 h0.76
  text "3v3" at 95.631,48.895 h0.76
  text "TX" at 95.504,47.625 h0.76
  text "RX" at 95.631,46.355 h0.76
  text "GND" at 95.631,45.085 h0.76
  text "UART" at 95.123,41.529 h1.02
  text "MAX M10s v3.0" at 127.508,36.195 h1.52
  text "RX" at 107.442,34.29 h0.76 r90
  text "TX" at 109.982,34.29 h0.76 r90
  text "Designed by Sean M" at 127.508,34.248 h1.02
  text "GND" at 104.902,33.782 h0.76 r90
  text "GND" at 116.586,33.782 h0.76 r90
  text "SCL" at 119.126,33.782 h0.76 r90
  text "3v3" at 124.206,33.782 h0.76 r90
  text "SDA" at 121.793,33.655 h0.76 r90
Mechanical 1:
  lines w0.254: 94.23,34.29 ccw(c94.25,34.29) 94.25,34.27 ccw(c95.52,34.27) 95.52,33 152.98,33 ccw(c152.98,34.27) 154.25,34.27 154.25,41.133 154.25,54.859 154.25,61.722 ccw(c152.98,61.722) 152.98,62.992 95.5,62.992 ccw(c95.5,61.722) 94.23,61.722 94.23,34.29